# EAGLE board RAC-altimeter (EAGLE 9.4.2)
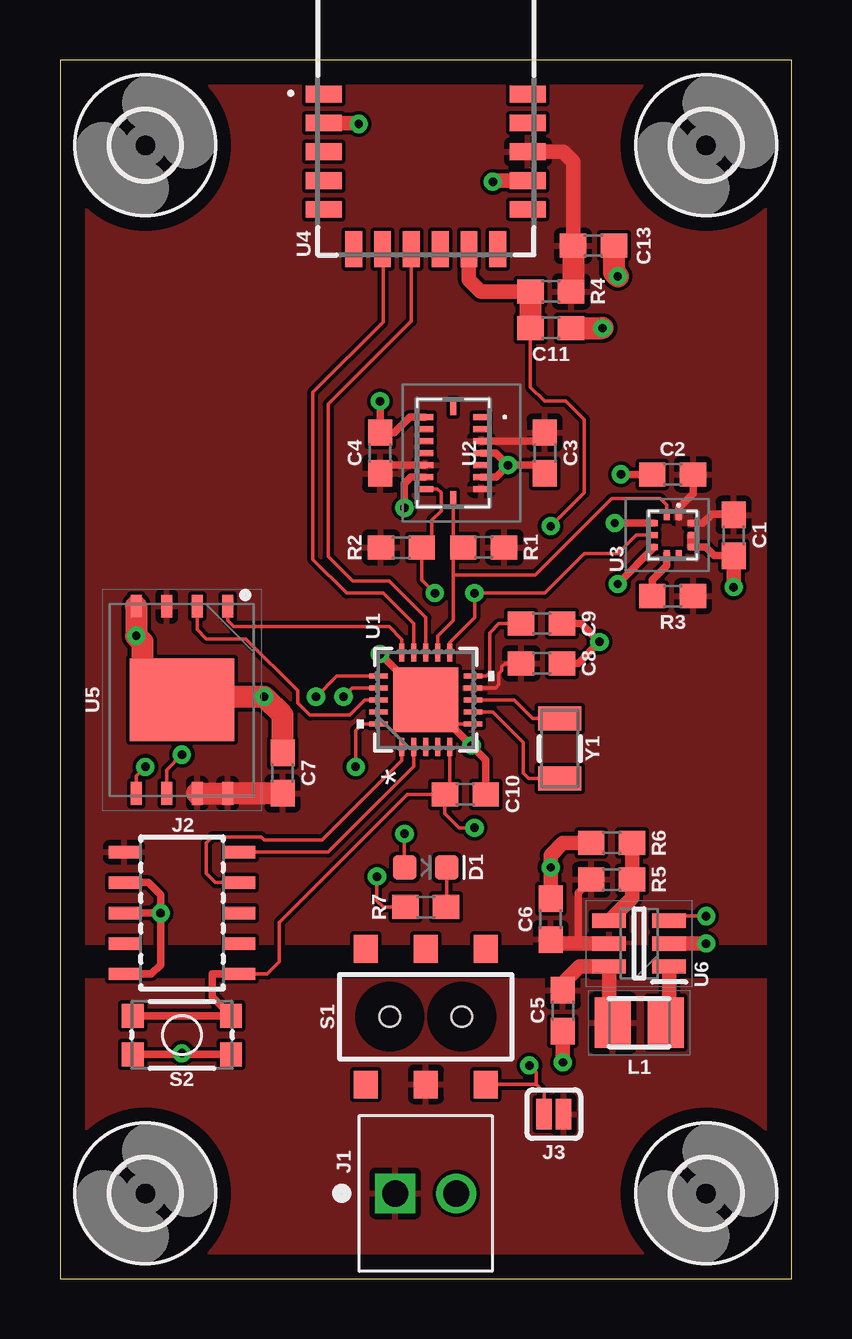
[diagram p0: board, top side]
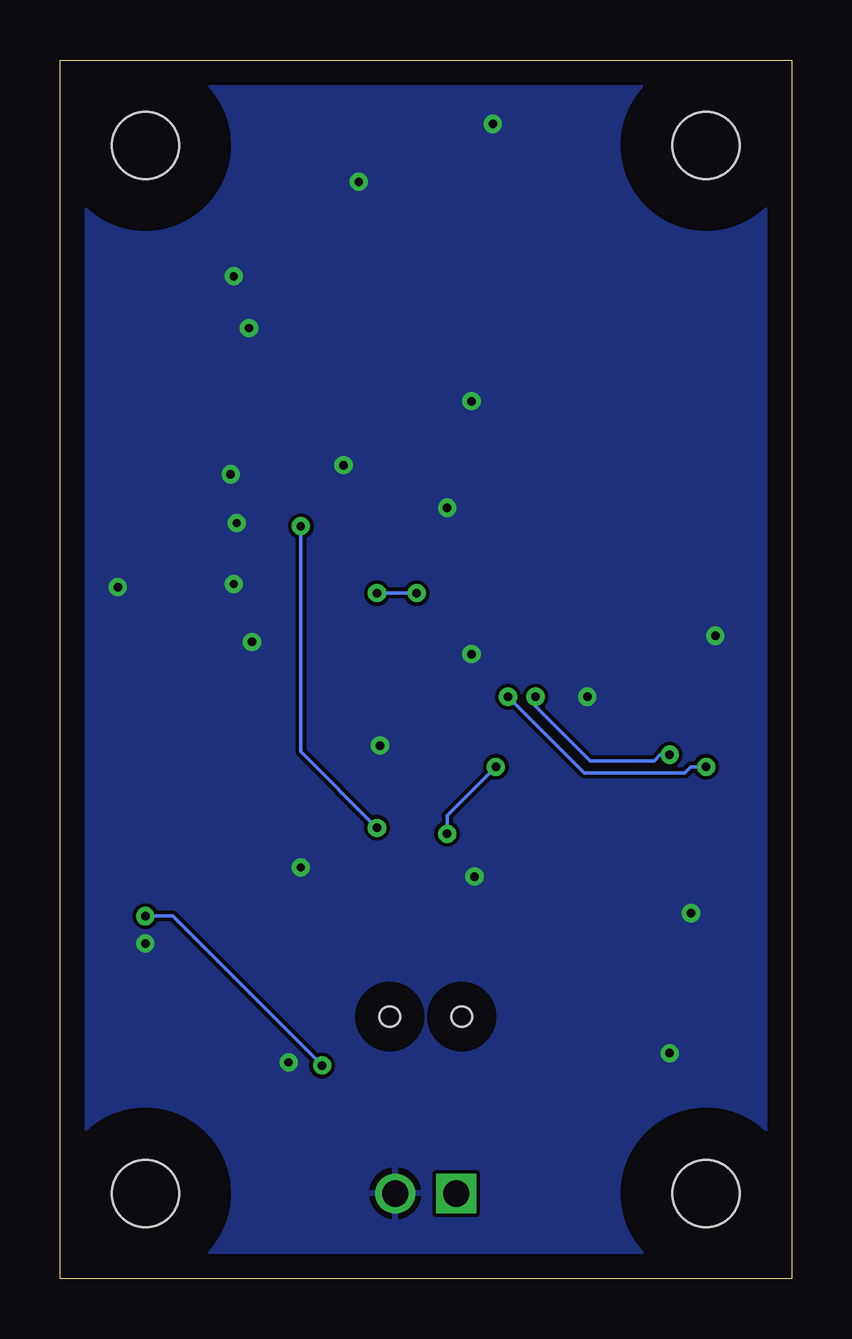
[diagram p1: board, bottom side, seen from below]

Size 30.48 x 50.8 mm. Coordinates in mm from the lower left corner, seen from the top.
Outline: 0,0 30.48,0 30.48,50.8 0,50.8 0,0
Copper layers (1*16): Top 0.035mm / dielectric 1.5mm / Bottom 0.035mm
Design rules "default": minimum track width 6mil, minimum drill 0.35mm, track to track 6mil, track to pad 6mil, pad to pad 6mil, via to via 6mil, smd to smd 6mil, copper to edge 40mil, drill to drill 6mil, minimum pad ring 10mil, minimum via ring 8mil, stop-mask expansion 4mil, vias tented up to drill 0mil, thermal gap 10mil

## Footprints (pad centres in the part's own frame; a part is rotated, then mirrored left to right if it is on the bottom)
0603 = smd 1.1 x 1: 1 -0.85,0; 2 0.85,0
LED-0603 = smd 1 x 1: A -0.877,0; C 0.877,0
2,8 = hole 2.8: 0,0
CONN_282834-2 = drill 1.1 square: 1 -1.27,0 | drill 1.1: 2 1.27,0
SAMTECH_FTSH-105-01 = smd 0.508 x 1.27: 1 -2.54,-2.413; 2 -2.54,2.413; 3 -1.27,-2.413; 4 -1.27,2.413; 5 0,-2.413; 6 0,2.413; 7 1.27,-2.413; 8 1.27,2.413; 9 2.54,-2.413; 10 2.54,2.413
SMT-JUMPER_2_NO_SILK = smd 0.635 x 1.27: 1 -0.406,0; 2 0.406,0
INDM2520X120N = smd 1.5 x 2.1: 1 -1.1,0; 2 1.1,0
SWITCH_DPDT_SMD_AYZ0202 = smd 1 x 1.15: 1 -2.5,2.825; 2 0,2.825; 3 2.5,2.825; 4 -2.5,-2.825; 5 0,-2.825; 6 2.5,-2.825 | hole 0.85: 1.5,0; -1.5,0
TACTILE_SWITCH_SMD_4.6X2.8MM = smd 0.9 x 1: 1 -2.05,-0.8; 2 2.05,-0.8; 3 2.05,0.8; 4 -2.05,0.8
21-0139V_T2044+5 = smd 0.762 x 0.203: 1 -1.968,1; 2 -1.968,0.5; 3 -1.968,0; 4 -1.968,-0.5; 5 -1.968,-1; 11 1.968,-1; 12 1.968,-0.5; 13 1.968,0; 14 1.968,0.5; 15 1.968,1 | smd 0.203 x 0.762: 6 -1,-1.968; 7 -0.5,-1.968; 8 0,-1.968; 9 0.5,-1.968; 10 1,-1.968; 16 1,1.968; 17 0.5,1.968; 18 0,1.968; 19 -0.5,1.968; 20 -1,1.968 | smd 2.692 x 2.692: 21 0,0
BMI088 = smd 0.25 x 0.675: 1 -1.5,1.165; 2 -1,1.165; 3 -0.5,1.165; 4 0,1.165; 5 0.5,1.165; 6 1,1.165; 7 1.5,1.165; 9 1.5,-1.165; 10 1,-1.165; 11 0.5,-1.165; 12 0,-1.165; 13 -0.5,-1.165; 14 -1,-1.165; 15 -1.5,-1.165 | smd 0.675 x 0.25: 8 1.915,0; 16 -1.915,0
BMP388 = smd 0.25 x 0.275: 1 0.25,0.763; 2 -0.25,0.763; 6 -0.25,-0.763; 7 0.25,-0.763 | smd 0.275 x 0.25: 3 -0.762,0.5; 4 -0.762,0; 5 -0.762,-0.5; 8 0.762,-0.5; 9 0.762,0; 10 0.762,0.5
RN4871 = smd 1.5 x 0.7: 1 -4.25,6.7; 2 -4.25,5.5; 3 -4.25,4.3; 4 -4.25,3.1; 5 -4.25,1.9; 12 4.25,1.9; 13 4.25,3.1; 14 4.25,4.3; 15 4.25,5.5; 16 4.25,6.7 | smd 0.7 x 1.5: 6 -3,0.25; 7 -1.8,0.25; 8 -0.6,0.25; 9 0.6,0.25; 10 1.8,0.25; 11 3,0.25
SON127P800X600X80-9N = smd 0.95 x 0.45: 1 -3.9,1.905; 2 -3.9,0.635; 3 -3.9,-0.635; 4 -3.9,-1.905; 5 3.9,-1.905; 6 3.9,-0.635; 7 3.9,0.635; 8 3.9,1.905 | smd 3.45 x 4.35: 9 0,0
SOT95P270X145-6N = smd 1.4 x 0.6: 1 -1.25,0.95; 2 -1.25,0; 3 -1.25,-0.95; 4 1.25,-0.95; 5 1.25,0; 6 1.25,0.95
CRYSTAL-SMD-3.2X1.5MM = smd 1 x 1.8: P$1 -1.25,0; P$2 1.25,0

## Placement (x,y rotation side)
C1  0.1uF  [0603]  28.07,30.99 270 top
C2  0.1uF  [0603]  25.53,33.53 180 top
C3  0.1uF  [0603]  20.19,34.42 270 top
C4  0.1uF  [0603]  13.34,34.42 270 top
C5  10uF  [0603]  20.95,11.18 270 top
C6  10uF  [0603]  20.45,14.99 90 top
C7  10uF  [0603]  9.27,21.08 90 top
C8  1.0uF  [0603]  20.07,25.65 0 top
C9  1.0uF  [0603]  20.07,27.3 0 top
C10  0.1uF  [0603]  16.89,20.19 0 top
C11  1.0uF  [0603]  20.45,39.62 0 top
C13  10uF  [0603]  22.23,43.05 0 top
D1  [LED-0603]  15.24,17.14 0 top
H1  MOUNT-HOLE2.8  [2,8]  3.56,47.24 0 top
H2  MOUNT-HOLE2.8  [2,8]  26.92,47.24 0 top
H3  MOUNT-HOLE2.8  [2,8]  3.56,3.56 0 top
H4  MOUNT-HOLE2.8  [2,8]  26.92,3.56 0 top
J1  282834-2  [CONN_282834-2]  15.24,3.56 0 top
J2  CORTEX_DEBUG_SMD  [SAMTECH_FTSH-105-01]  5.08,15.24 270 top
J3  JUMPER-SMT_2_NO_SILK  [SMT-JUMPER_2_NO_SILK]  20.57,6.86 180 top
L1  MAMK2520T4R7M  [INDM2520X120N]  24.13,10.67 0 top
R1  4.7k  [0603]  17.65,30.48 0 top
R2  4.7k  [0603]  14.22,30.48 180 top
R3  10k  [0603]  25.53,28.45 0 top
R4  4.7k  [0603]  20.45,41.15 0 top
R5  348k  [0603]  22.99,16.64 180 top
R6  200k  [0603]  22.99,18.16 0 top
R7  470  [0603]  15.24,15.49 180 top
S1  [SWITCH_DPDT_SMD_AYZ0202]  15.24,10.92 180 top
S2  [TACTILE_SWITCH_SMD_4.6X2.8MM]  5.08,10.16 180 top
U1  MAX32660GTP+  [21-0139V_T2044+5]  15.24,24.13 90 top
U2  BMI088  [BMI088]  16.38,34.42 270 top
U3  BMP388  [BMP388]  25.53,30.99 0 top
U4  RN4871-I_RM130  [RN4871]  15.24,42.67 0 top
U5  W25N01GVZEIG_TR  [SON127P800X600X80-9N]  5.08,24.13 270 top
U6  MCP1640T-I_CHY  [SOT95P270X145-6N]  24.13,13.97 180 top
Y1  32.768kHz  [CRYSTAL-SMD-3.2X1.5MM]  20.83,22.1 270 top

## Library data of the parts
C1-C4 C10 = SparkFun-Capacitors; PROD_ID: CAP-00810
C5-C7 C13 = SparkFun-Capacitors; PROD_ID: CAP-11015
C8 C9 C11 = SparkFun-Capacitors; PROD_ID: CAP-00868
D1 = SparkFun-LED
H1-H4 = holes
J1 = RAC-Altimeter; CENTERLINE_PITCH: 2.54 mm[.1 in]; COMMENT: 282834-2; DESCRIPTION: TERMI-BLOK PCB MOUNT, 90 2P.; DIGI-KEY_PART_NUMBER: A98333-ND; DIGI-KEY_PURCHASE_URL: https://www.digikey.com/product-detail/en/te-connectivity-amp-connectors/282834-2/A98333-ND/1150135?utm_source=snapeda&utm_medium=aggregator&utm_campaign=symbol; EU_ROHS_COMPLIANCE: Compliant with Exemptions; MF: TE Connectivity; MP: 282834-2; NUMBER_OF_POSITIONS: 2; PACKAGE: None; TE_PURCHASE_URL: https://www.te.com/usa-en/product-282834-2.html?te_bu=Cor&te_type=disp&te_campaign=seda_glo_cor-seda-global-disp-prtnr-fy19-seda-model-bom-cta_sma-317_1&elqCampaignId=32493
J2 = SparkFun-Connectors
J3 = SparkFun-Jumpers
L1 = RAC-Altimeter; DESCRIPTION: TAIYO YUDEN - MAMK2520T4R7M - INDUCTOR, SHIELDED, 4.7UH, 1.5A, SMD; HEIGHT: 1.2mm; MANUFACTURER_NAME: TAIYO YUDEN; MANUFACTURER_PART_NUMBER: MAMK2520T4R7M
R1 R2 R4 = SparkFun-Resistors; PROD_ID: RES-07857
R3 = SparkFun-Resistors; PROD_ID: RES-00824
R5 = SparkFun-Resistors; PROD_ID: RES-12533
R6 = SparkFun-Resistors; PROD_ID: RES-09385
R7 = SparkFun-Resistors; PROD_ID: RES-07869
S1 = SparkFun-Switches; PROD_ID: SWCH-08179; SF_ID: COM-00597
S2 = SparkFun-Switches; PROD_ID: SWCH-13065
U1 = RAC-Altimeter; MANUFACTURER_PART_NUMBER: MAX32660GTP+; VENDOR: Maxim Integrated Products
U2 = BMI088; DESCRIPTION: Inertial Measurement Unit Digital Output 2.5V/3.3V Automotive; HEIGHT: 1.45mm; MANUFACTURER_NAME: Bosch; MANUFACTURER_PART_NUMBER: BMI088; MOUSER_PART_NUMBER: 262-BMI088
U3 = BMP388; DESCRIPTION: Board Mount Pressure Sensors MEMS Absolute Barometric Pressure Sensor; HEIGHT: 0.8mm; MANUFACTURER_NAME: Bosch; MANUFACTURER_PART_NUMBER: BMP388; MOUSER_PART_NUMBER: 262-BMP388
U4 = RAC-Altimeter; DESCRIPTION: Bluetooth BLE Module, Shielded, Antenna,; HEIGHT: mm; MANUFACTURER_NAME: Microchip; MANUFACTURER_PART_NUMBER: RN4871-I/RM130; MOUSER_PART_NUMBER: 579-RN4871IRM130; MOUSER_PRICE-STOCK: https://www.mouser.com/Search/Refine.aspx?Keyword=579-RN4871IRM130
U5 = RAC-Altimeter; DESCRIPTION: IC FLASH 1GBIT 104MHZ 8WSON; HEIGHT: 0.8mm; MANUFACTURER_NAME: Winbond; MANUFACTURER_PART_NUMBER: W25N01GVZEIG TR; MOUSER_PART_NUMBER: 454-W25N01GVZEIGTR; MOUSER_PRICE-STOCK: https://www.mouser.com/Search/Refine.aspx?Keyword=454-W25N01GVZEIGTR
U6 = RAC-Altimeter; DESCRIPTION: Microchip MCP1640T-I/CHY, Boost Converter, Step Up 0.35A Adjustable, 2 5.5 V, 575 kHz, 6-pin SOT-23; HEIGHT: 1.45mm; MANUFACTURER_NAME: Microchip; MANUFACTURER_PART_NUMBER: MCP1640T-I/CHY; MOUSER_PART_NUMBER: 579-MCP1640TI/CHY; MOUSER_PRICE-STOCK: https://www.mouser.com/Search/Refine.aspx?Keyword=579-MCP1640TI%2FCHY
Y1 = SparkFun-Clocks; PROD_ID: XTAL-13062

## Nets
32KIN: U1.8 Y1.P$1
32KOUT: U1.7 Y1.P$2
!RSTN: C10.1 C11.1 J2.10 R4.1 S2.1 S2.2 U1.5 U4.10
!SPI0_CS: U1.15 U5.1
BMP_CS: R3.1 U3.6
BOOST_EN: J3.2 S1.1 U6.3
GND: C1.2 C2.2 C3.2 C4.1 C5.2 C6.2 C7.2 C8.2 C9.2 C10.2 C11.2 C13.2 J1.2 J2.3 J2.5 J2.9 R6.1 R7.2 S2.3 S2.4 U1.6 U1.21 U2.4 U2.6 U2.10 U2.15 U3.3 U3.5 U3.8 U3.9 U4.2 U4.13 U5.4 U5.9 U6.2
I2C0_SCL: R1.1 U1.12 U2.8 U3.2
I2C0_SDA: R2.1 U1.11 U2.9 U3.4
IO_LED: D1.A U1.20
LED_CATH: D1.C R7.1
SPI0_MISO: U1.18 U5.2
SPI0_MOSI: U1.17 U5.5
SPI0_SCK: U1.16 U5.6
SW: L1.2 U6.1
SWDCLK: J2.4 U1.1
SWDIO: J2.2 U1.2
UART1_RX: U1.13 U4.8
UART1_TX: U1.14 U4.7
V_BATT: C5.1 J1.1 J3.1 L1.1 S1.2 U6.6
VCC: C1.1 C2.1 C3.1 C4.2 C6.1 C7.1 C8.1 C13.1 J2.1 R1.2 R2.2 R3.2 R4.2 R5.2 U1.9 U2.3 U2.7 U2.11 U3.1 U3.10 U4.14 U5.3 U5.7 U5.8 U6.5
VCORE: C9.1 U1.10
VFB: R5.1 R6.2 U6.4

## Tracks (layer width: path | path; a pad name or v marks a point on that pad's centre or on a via)
32KIN
  Top 0.152: U1.8 18.92,24.13 19.7,23.35 Y1.P$1
32KOUT
  Top 0.152: U1.7 18.03,23.62 19.3,22.35 19.3,21.08 19.54,20.85 Y1.P$2
!RSTN  (via drill 0.35)
  Top 0.152: C10.1 16.24,20.39 U1.5 | C11.1 19.6,37.17 20.19,36.58 21.08,36.58 21.84,35.81 21.84,32.77 v20.45,31.37 | C10.1 16.04,19.39 16.64,18.8 v17.27,18.8 | C10.1 14.48,20.19 9.14,14.86 9.14,13.21 8.64,12.7 J2.10
  Top 0.305: J2.10 6.35,12.7 6.35,11.74 S2.1 S2.2
  Top 0.61: R4.1 17.53,41.15 17.04,41.63 U4.10
  Top 0.914: R4.1 C11.1
  Bottom 0.152: v20.45,31.37 20.45,21.97 v17.27,18.8
!SPI0_CS
  Top 0.152: U1.15 14.24,26.65 13.72,27.18 7.24,27.18 6.99,27.43 U5.1
BMP_CS
  Top 0.305: U3.6 25.28,29.72 24.68,29.12 R3.1
BOOST_EN  (via drill 0.35)
  Top 0.152: S1.1 19.84,8.1 | J3.2 20.17,7.77 19.84,8.1 | 19.84,8.1 19.84,8.61 v19.56,8.89 | v26.92,15.11 25.57,15.11 U6.3
  Bottom 0.152: v19.56,8.89 25.78,15.11 v26.92,15.11
GND  (via drill 0.35)
  Top 0.152: U1.6 16.24,23.13 U1.21 | R7.2 13.46,15.49 13.21,15.75 v13.21,16.76
  Top 0.305: v13.34,26.04 U1.21 v17.14,22.23 17.74,21.63 C10.2 | U2.15 14.58,35.92 13.93,35.27 C4.1 v13.34,36.58 | U2.4 18.16,34.42 v18.67,33.91 | v18.67,33.91 18.18,33.42 U2.6 | U2.10 14.62,33.42 14.35,33.15 v14.35,32.13 | U3.9 U3.8 26.92,30.49 27.27,30.14 C1.2 | U3.3 23.12,31.49 v23.11,31.5 | C2.2 v23.37,33.53 | S2.3 5.04,9.36 | 5.04,9.36 v5.08,9.4 | S2.4 5.04,9.36 | J2.5 v4.19,15.24 | J2.3 3.68,16.51 4.19,16 v4.19,15.24 | J2.9 3.81,12.7 4.19,13.08 v4.19,15.24 | C8.2 21.59,25.65 v22.48,26.54 21.72,27.3 C9.2 | v18.67,33.91 19.85,33.91 C3.2 | U3.5 v23.24,28.96
  Top 0.61: U6.2 v26.92,13.97 | C6.2 v20.45,17.14 20.45,17.65 20.95,18.16 R6.1 | C5.2 v20.95,9.02 | U4.13 18.09,45.77 v18.03,45.72 | U4.2 12.41,48.17 v12.45,48.13 | C1.2 v28.07,28.83
  Top 0.914: C7.2 9.27,23.5 v8.51,24.26 5.21,24.26 | 5.21,24.26 U5.9 | U5.4 v3.17,26.8 3.43,26.54 3.43,24.89 4.06,24.26 5.21,24.26 | C11.2 v22.61,39.62 | C13.2 23.07,41.95 v23.24,41.78
  pour Bottom (isolate 0.001): 0,50.8 30.48,50.8 30.48,0 0,0
I2C0_SCL
  Top 0.152: U2.8 16.38,30.9 R1.1 16.38,30.06 16.38,29.34 | U3.2 25.27,32.26 25.02,32.51 22.99,32.51 19.81,29.34 16.38,29.34 | U1.12 15.74,26.79 16.38,27.43 16.38,29.34
I2C0_SDA  (via drill 0.35)
  Top 0.152: U2.9 15.72,32.92 15.88,32.77 15.88,32 15.49,31.62 15.49,30.73 15.24,30.48 R2.1 15.07,29.12 v15.62,28.57 | U3.4 24,30.99 23.24,30.23 21.84,30.23 20.19,28.57 v17.27,28.57 17.27,27.56 16.24,26.53 U1.11
  Bottom 0.152: v15.62,28.57 v17.27,28.57
IO_LED  (via drill 0.35)
  Top 0.152: U1.20 12.59,23.13 12.32,22.86 12.32,22.73 v12.32,21.34 | v14.35,18.54 14.35,17.16 D1.A
  Bottom 0.152: v12.32,21.34 14.35,19.3 v14.35,18.54
LED_CATH
  Top 0.152: D1.C 16.12,15.52 R7.1
SPI0_MISO
  Top 0.152: U1.18 12.7,24.13 12.06,23.5 10.41,23.5 9.91,24 9.91,24.51 7.75,26.67 6.1,26.67 5.71,27.05 U5.2
SPI0_MOSI  (via drill 0.35)
  Top 0.152: U5.5 3.17,20.95 v3.56,21.34 | v11.81,24.26 12.18,24.63 U1.17
  Bottom 0.152: v3.56,21.34 4.19,21.34 4.45,21.08 8.64,21.08 v11.81,24.26
SPI0_SCK  (via drill 0.35)
  Top 0.152: U5.6 4.45,21.21 v5.08,21.84 | U1.16 11.54,25.13 v10.67,24.26
  Bottom 0.152: v5.08,21.84 5.46,21.84 5.71,21.59 8.38,21.59 10.67,23.88 v10.67,24.26
SW
  Top 0.61: U6.1 25.38,10.82 L1.2
SWDCLK
  Top 0.152: U1.1 14.24,21.61 10.92,18.29 8.51,18.29 8.38,18.41 6.35,18.41 6.1,18.16 6.1,16.89 6.48,16.51 J2.4
SWDIO
  Top 0.152: U1.2 14.74,21.34 11.18,17.78 J2.2
UART1_RX
  Top 0.152: U1.13 15.24,27.56 13.72,29.08 12.19,29.08 11.18,30.1 11.18,36.45 14.64,39.91 U4.8
UART1_TX
  Top 0.152: U1.14 14.73,27.3 13.46,28.57 11.94,28.57 10.54,29.97 10.54,36.96 13.46,39.88 13.46,42.9 U4.7
V_BATT
  Top 0.61: L1.1 22.88,10.82 U6.6 21.66,13.02 20.95,12.32 C5.1
  pour Top (isolate 0.001): 0,0 30.48,0 30.48,12.45 0,12.45
VCC
  Top 0.152: U1.9 18.15,24.63 18.29,24.77 18.29,25.22 18.41,25.35 18.41,25.53 18.54,25.65 C8.1
  Top 0.305: U2.3 19.84,34.92 C3.1 | U2.11 13.69,33.92 C4.2 | U3.1 25.78,32.13 26.38,32.73 C2.1 | U3.10 26.79,31.49 27.18,31.88 28.03,31.88 C1.1 | R5.2 21.59,16.09 21.59,13.97
  Top 0.61: U6.5 21.59,13.97 20.61,13.97 C6.1 | U4.14 20.97,46.97 21.38,46.57 C13.1
  Top 0.914: U5.7 U5.8 C7.1 | C13.1 21.38,41.23 R4.2
  pour Top (isolate 0.001): 0,50.8 30.48,50.8 30.48,13.97 0,13.97
VCORE
  Top 0.152: C9.1 18.29,27.3 17.91,26.92 17.91,25.27 17.76,25.13 U1.10
VFB
  Top 0.61: U6.4 23.84,15.88 R5.1 R6.2